# Altium PCB CtlBoard_issueA.PcbDoc
Units mm, origin at the board's own origin, x right, y up, seen from the top; angles counter-clockwise.
Board outline 86.2 x 23.2 mm, 2 copper layers (Top Layer, Bottom Layer), stack 1.572 mm thick; 37 components, 25 nets, 100 pads, 51 vias.
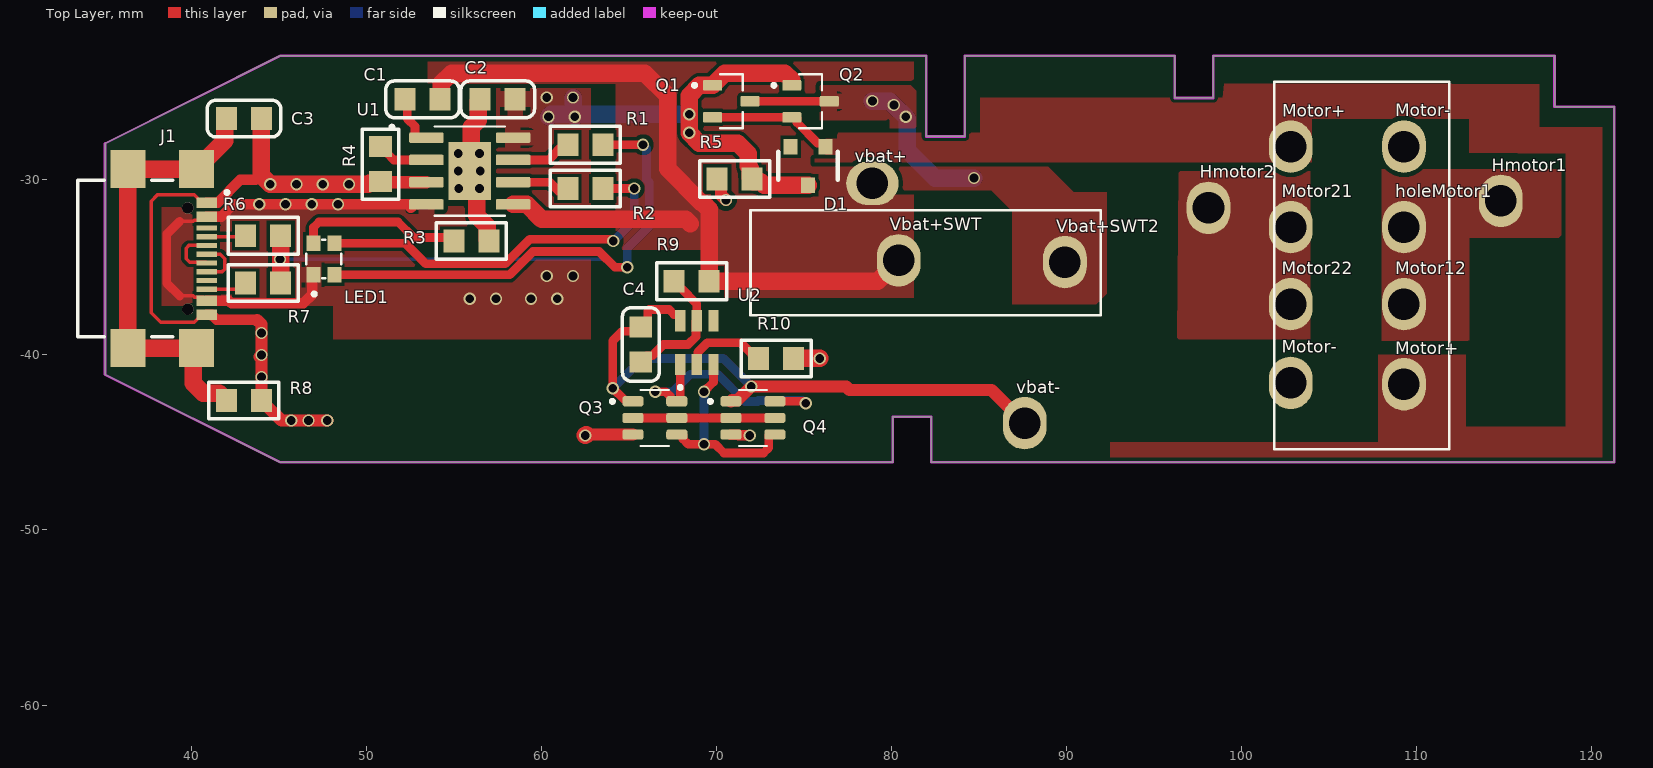
[diagram p0: Top Layer view]
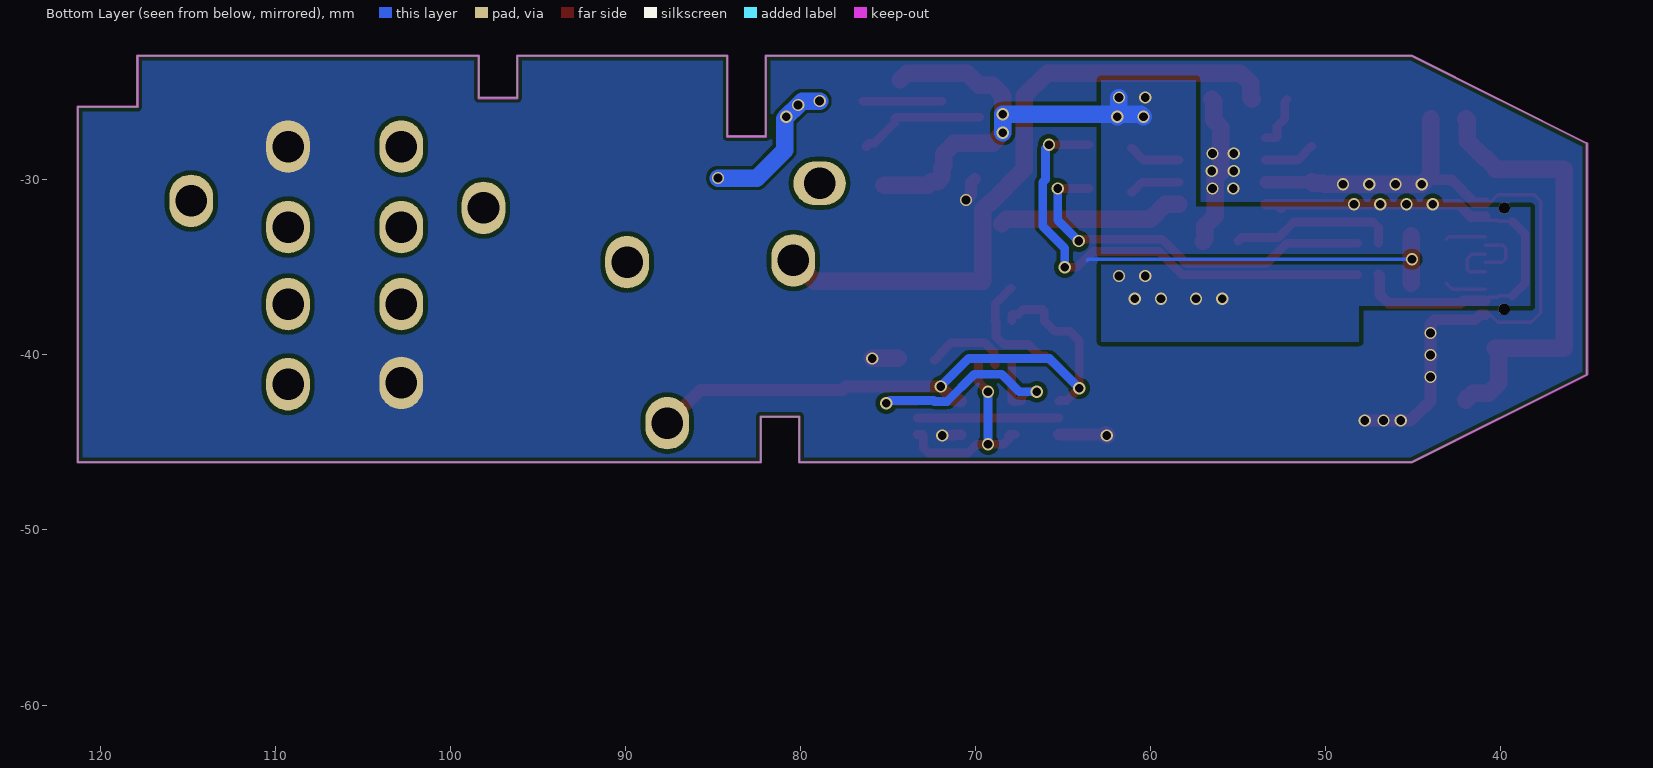
[diagram p1: Bottom Layer view, seen from below]

## Layer stack, top to bottom
Top Solder: solder mask 0.0102, Solder Resist, Dk 3.5
Top Layer: signal copper 0.035
Prepeg1: prepreg 0.2184, PP-023, Dk 4.5
core: dielectric 1.065, FR-4, Dk 4.8
Prepeg2: prepreg 0.2184, PP-023, Dk 4.5
Bottom Layer: signal copper 0.035
Bottom Solder: solder mask 0.0102, Solder Resist, Dk 3.5

## Board outline
80.067,-46.123 80.067,-43.523 82.267,-43.523 82.267,-46.123 121.267,-46.123 121.267,-25.823 117.867,-25.823 117.867,-22.923 98.367,-22.923 98.367,-25.323 96.167,-25.323 96.167,-22.923 84.167,-22.923 84.167,-27.523 81.967,-27.523 81.967,-22.923 45.067,-22.923 35.067,-27.923 35.067,-41.123 45.067,-46.123

## Design rules (kind name [scope] priority, off if disabled: settings)
Clearance Clearance_4 [HasFootprint('USBc4110-GF-A_REVB') vs HasFootprint('USBc4110-GF-A_REVB')] p1: gap=0.15 ignorepadtopadclearanceinfootprint=FALSE except(0: Arc-Hole Track-Hole SMDPad-Hole THPad-Hole Via-Hole Fill-Hole Poly-Hole Region-Hole Text-Hole) // USB -C CONNECTOR EXEPTIONS
Clearance [All] p2: gap=0.254 ignorepadtopadclearanceinfootprint=FALSE except(0: Arc-Hole Track-Hole SMDPad-Hole THPad-Hole Via-Hole Fill-Hole Poly-Hole Region-Hole Text-Hole; 0.076: Track-Track; 0.127: Arc-Arc Arc-Track SMDPad-SMDPad; 0.2: Arc-SMDPad Track-SMDPad Track-Fill Track-Poly Track-Region SMDPad-Fill SMDPad-Poly SMDPad-Region; 0.33: Track-THPad; 0.5: THPad-THPad) // JLC PCB
DiffPairsRouting [All] p1: maxlimit=0.254 minlimit=0.254 mostfreqgap=0.254 toplayer_minwidth=0.127 toplayer_maxwidth=0.381 toplayer_prefwidth=0.381 bottomlayer_minwidth=0.381 bottomlayer_maxwidth=0.381 bottomlayer_prefwidth=0.381 maxuncoupledlength=12.7
FabricationTestPointUsage TestPointUsage [All] p1: valid=0 allowmultiple=FALSE
FabricationTestpoint Testpoint [All] p1: side=3 testpointundercomponent=TRUE minsize=1.016 maxsize=2.54 preferedsize=1.524 minholesize=0.508 maxholesize=1.016 preferedholesize=0.813 testpointgrid=0.025 allowsidetop=TRUE allowsidebottom=TRUE usegrid=TRUE gridtolerance=0
Height [All] p1: minheight=0 maxheight=30 prefheight=12.7
HoleSize [InNetClass('All Nets')] p1: absolutevalues=TRUE maxlimit=6.5 minlimit=0.15 maxpercent=80.000 minpercent=20.000
HoleSize PlatedSlot [InNetClass('All Nets')] p2: absolutevalues=TRUE maxlimit=6.5 minlimit=0.15 maxpercent=80.000 minpercent=20.000
HoleSize NonPlatedSlot [InNetClass('All Nets')] p3: absolutevalues=TRUE maxlimit=6.5 minlimit=0.15 maxpercent=80.000 minpercent=20.000
MinimumSolderMaskSliver [All] p1: minsoldermaskwidth=0.2
PasteMaskExpansion PasteMaskExpansion_1 [All] p2: expansion=0
PlaneClearance PlaneClearance_1 [All] p1: clearance=0.508
PlaneClearance [All] p2: clearance=0.254
PlaneConnect PlaneConnect_1 [InNet('VBUS')] p1: planeconnectstyle=Direct reliefexpansion=0.508 reliefentries=4 reliefconductorwidth=0.254 reliefairgap=0.254
PlaneConnect [All] p2: planeconnectstyle=Direct reliefexpansion=0.508 reliefentries=4 reliefconductorwidth=0.254 reliefairgap=0.254
PolygonConnect PolygonConnect_VBUS [All] p1: thpad.connectstyle=Direct thpad.reliefconductorwidth=0.254 thpad.reliefentries=4 thpad.polygonreliefangle="90 Angle" thpad.airgapwidth=0.254 smdpad.connectstyle=Relief smdpad.reliefconductorwidth=0.9 smdpad.reliefentries=4 smdpad.polygonreliefangle="90 Angle" smdpad.airgapwidth=0.254 via.connectstyle=Direct via.reliefconductorwidth=0.254 via.reliefentries=4 via.polygonreliefangle="90 Angle" via.airgapwidth=0.254
PolygonConnect PolygonConnect_VD33 [InNet('VD33')] p2: connectstyle=Direct reliefconductorwidth=0.254 reliefentries=4 polygonreliefangle="90 Angle" airgapwidth=0.254
PolygonConnect [All] p3: connectstyle=Relief reliefconductorwidth=0.254 reliefentries=4 polygonreliefangle="90 Angle" airgapwidth=0.254
RoutingVias [All] p1: holewidth=0.5 width=0.7 viastyle="Through Hole" minholewidth=0.2 minwidth=0.4 maxholewidth=1 maxwidth=2 viatemplateguid#1={9CC2C62E-9A94-49F8-BFC1-2DE6E39486EC} viatemplateguid#2={3F7673C6-29B5-4E43-866C-EA4EEBB81D59} viatemplateguid#3={DF825023-4461-4306-8155-B17925B55DEA} viatemplateguid#4={6843DF4C-3EEC-417A-807C-60BAB1C6514E} viatemplateguid#5={9E414EF3-CE01-48F1-8449-4E532C2390F4} viatemplatename#1=v70h50 viatemplatename#2=v25h15 viatemplatename#3=v30h15 viatemplatename#4=v50h30 viatemplatename#5=v120h70 // JLC PCB
ShortCircuit ShortCircuit_1 [All] p2: allowed=FALSE
SilkToSilkClearance [All] p1: silktosilkclearance=0.127
SilkToSolderMaskClearance [IsPad] p1: minsilkscreentomaskgap=0.127 clearancetoexposedcopper=TRUE
SolderMaskExpansion SolderMaskExpansion_1 [All] p1: expansion=0.102 istentingtop=FALSE
SolderMaskExpansion [All] p2: expansion=0.051 istentingtop=FALSE
SupplyNets "Schematic Supply Nets_4" [InNet('CHS')] p1: voltage=0.000
SupplyNets "Schematic Supply Nets_3" [InNet('GND')] p2: voltage=0.000
SupplyNets "Schematic Supply Nets_2" [InNet('-Vbat')] p3: voltage=0.000
SupplyNets "Schematic Supply Nets_1" [InNet('VBUS')] p4: voltage=0.000
SupplyNets "Schematic Supply Nets" [InNet('+Vbat')] p5: voltage=0.000
UnRoutedNet UnRoutedNet_1 [All] p2:
Width Width_1 [All] p1: maxlimit=3 minlimit=0.076 preferedwidth=0.2
20 further rules are at their usual default settings.

## Components (designator, comment, footprint, x,y, rotation, side; value= is the part's Value field where it differs from the comment)
C1 "10U" CAPC2012X60N 53.2,-25.4 r0 top
C2 "100N" CAPC2012X60N 57.5,-25.4 r0 top
C3 "100N" CAPC2012X60N 43,-26.5 r0 top
C4 "100N" CAPC2012X60N 65.675,-39.4 r270 top
D1 "ZHCS1000TA" SOT95P230X110-3N 75.227,-29.204 r90 top
Hmotor1 "TESTPINT" P200X100H90L100H50 114.8,-31.2 r90 top
Hmotor2 "TESTPINT" P200X100H90L100H50 98.1,-31.6 r90 top
holeMotor1 "TESTPINT" P200X100H90L100H50 109.267,-32.7 r90 top
J1 "USB" GCT_USB4110-GF-A_REVB 39.8,-34.5 r270 top
LED1 "LED RGB" LEDSC220X200X190-4 47.567,-34.523 r90 top
Motor12 "TESTPINT" P200X100H90L100H50 109.267,-37.1 r90 top
Motor21 "TESTPINT" P200X100H90L100H50 102.8,-32.7 r90 top
Motor22 "TESTPINT" P200X100H90L100H50 102.8,-37.1 r90 top
Motor+ "TESTPINT" P200X100H90L100H50 102.8,-28.1 r90 top
Motor+ "TESTPINT" P200X100H90L100H50 109.267,-41.673 r90 top
Motor- "TESTPINT" P200X100H90L100H50 102.8,-41.6 r90 top
Motor- "TESTPINT" P200X100H90L100H50 109.267,-28.1 r90 top
Q1 "" SOT91P240X110-3N 70.843,-25.515 r0 top
Q2 "" SOT91P240X110-3N 75.368,-25.515 r0 top
Q3 "FS8205" SOT95P280X145-6N#1 66.475,-43.6 r0 top
Q4 "FS8205" SOT95P280X145-6N#1 72.075,-43.6 r0 top
R1 "1K0" RESC2012X60N 62.5,-28 r180 top
R2 "1K0" RESC2012X60N 62.5,-30.5 r180 top
R3 "1K0" RESC2012X60N 56,-33.5 r180 top
R4 "1K2" RESC2012X60N 50.8,-29.1 r90 top
R5 "10K" RESC2012X60N 71.027,-29.954 r0 top
R6 "5K1" RESC2012X60N 44.1,-33.2 r180 top
R7 "5K1" RESC2012X60N 44.1,-35.9 r180 top
R8 "0R0" RESC2012X60N 43,-42.6 r180 top
R9 "100R" RESC2012X60N 68.575,-35.8 r180 top
R10 "1K0" RESC2012X60N 73.4,-40.2 r180 top
U1 "LITHUM CHARGER" SOP127P600X175-9N 55.9,-29.5 r270 top
U2 "LITHUM PROTECTION" SOT95P280X145-6N#2 68.875,-39.3 r90 top
vbat+ "TESTPINT" P200X100H90L100H50 78.9,-30.2 r180 top
Vbat+SWT "TESTPINT" P200X100H90L100H50 80.4,-34.6 r90 top
Vbat+SWT2 "TESTPINT" P200X100H90L100H50 89.9,-34.7 r90 top
vbat- "TESTPINT" P200X100H90L100H50 87.6,-43.9 r90 top

## Footprints (in the part's own frame and the unit in brackets; to place one, negate y for a bottom-side part, rotate by r counter-clockwise, add the part's x,y. Pads: shape width x height; smd on the part's side, far side on the other; paste and mask are expansions set on the pad)
CAPC2012X60N [mm] "[0002]CAP0805_SMD_CAPC2012X60N"
  rect 1.2x1.3 smd paste+0: 1(-1,0) 2(1,0)
  silkscreen extent -2.1,-1.05 2.1,1.05, body extent -0.97,-0.65 1.03,0.6, height 0.78
GCT_USB4110-GF-A_REVB [mm] "[0502]USB_C_2-0_SMD_RA_USB4110-GF"
  rect 0.6x1.15 smd: A1/B12(-3.2,1.075) A4/B9(-2.4,1.075) B1/A12(3.2,1.075) B4/A9(2.4,1.075)
  rect 0.3x1.15 smd: A5(-1.25,1.075) A6(-0.25,1.075) A7(0.25,1.075) A8(1.25,1.075) B5(1.75,1.075) B6(0.75,1.075) B7(-0.75,1.075) B8(-1.75,1.075)
  rect 2.18x2 smd: S1(-5.11,0.5) S2(5.11,0.5) S3(-5.11,-3.43) S4(5.11,-3.43)
  round 0.65 hole 0.65 unplated: ""(-2.89,0) ""(2.89,0)
  silkscreen extent -4.47,-6.28 4.47,2.33, body extent -5.65,-6.28 5.65,1.42, height 3.27
LEDSC220X200X190-4 [mm] "[0401]LED_RGB_SMT_ASMB-KTF0-0A306_LEDSC220X200X190-4"
  rect 0.9x0.8 smd: 1(-0.9,0.6) 2(-0.9,-0.6) 3(0.9,-0.6) 4(0.9,0.6)
  silkscreen extent -2.1,-1 1.1,1, body extent -1.1,-1 1.1,1, height 1.93
P200X100H90L100H50 [mm] "[0510]TestPin_Serrated_THT_P200X100H90L100H50"
  oval 3x2.5 hole 1.8: 1(0,0)
  body extent -0.45,-0.45 0.45,0.45, height 6.8
RESC2012X60N [mm] "[0001]RES0805_SMD_RESC2012X60N"
  rect 1.2x1.3 smd paste+0: 1(-1,0) 2(1,0)
  silkscreen extent -2,-1.05 2,1.05, body extent -0.97,-0.63 1.03,0.63, height 0.47
SOP127P600X175-9N [mm] "[0117]TP4056_SOP127P600X175-9N"
  rrect25% 0.6x1.97 smd: 1(-1.905,-2.475) 2(-0.635,-2.475) 3(0.635,-2.475) 4(1.905,-2.475) 5(1.905,2.475) 6(0.635,2.475) 7(-0.635,2.475) 8(-1.905,2.475)
  rect 3.302x2.413 smd paste-3: 9(0,0)
  silkscreen extent -2.6,-4.54 2.55,2, body extent -2.45,-3 2.45,3, height 1.76
SOT91P240X110-3N [mm] "[0303]DMP1045U_SOT91P240X110-3N"
  rrect25% 1.09x0.61 smd: 1(-1.07,0.915) 2(-1.07,-0.915) 3(1.07,0)
  silkscreen extent -2.2,-1.54 0.65,1.54, body extent -1.21,-1.5 1.21,1.5, height 1.13
SOT95P230X110-3N [mm] "[0308]Diode_Schottky_SMT_SOT95P230X110-3N"
  rect 0.9x0.8 smd paste+0: 1(1.1,-1) 2(1.1,1) 3(-1.1,0)
  silkscreen extent -0.8,-1.7 0.8,1.7, body extent -1.18,-1.45 1.18,1.45, height 1.31
SOT95P280X145-6N#1 [mm] "[0303]FS8205_SOT95P280X145-6N"
  rrect50% 1.21x0.59 smd: 1(-1.255,0.95) 2(-1.255,0) 3(-1.255,-0.95) 4(1.255,-0.95) 5(1.255,0) 6(1.255,0.95)
  silkscreen extent -2.53,-1.6 0.8,1.6, body extent -1.4,-1.45 1.4,1.45, height 1.46
SOT95P280X145-6N#2 [mm] "[0303]FS8205_SOT95P280X145-6N"
  rect 1.21x0.59 smd: 1(-1.255,0.95) 2(-1.255,0) 3(-1.255,-0.95) 4(1.255,-0.95) 5(1.255,0) 6(1.255,0.95)
  silkscreen extent -2.65,0.85 -2.46,1.05, body extent -1.4,-1.45 1.4,1.45, height 1.46

## Part data
C1: library part 139, "10U 0805  X6S 35V SMD Ceramic capacitor"
C2 C3 C4: library part 118, "100N 0805 X7R 5% 50V SMD Ceramic capacitor"
D1: library part 219, "ZHCS1000TA Schottky Rectifier, 40V 1A 425 mV"
Hmotor1 Hmotor2 holeMotor1 Motor12 Motor21 Motor22 Motor+ Motor+ Motor- Motor- vbat+ Vbat+SWT Vbat+SWT2 vbat-: library part 509
J1: library part 399, "USB C CONNECTOR SMD"
LED1: library part 557, "ASMB-KTF0-0A306"
Q1 Q2: library part 527, "MOSFET"
Q3 Q4: library part FS8205_1, "Dual N-Channel Enhancement Mode Power MOSFET"
R1 R2 R3 R10: library part 21, "1K0 0805 Thick Film 1% Resistor"
R4: library part 23, "1K2 0805 Thick Film 1% Resistor"
R5: library part 6, "10K 0805Thick Film 1% Resistor"
R6 R7: library part 109, "5K1  0805 Thick Film 1% Resistor"
R8: library part 0, "0R0 0805Thick Film 1% Resistor"
R9: library part 3, "100R 0805Thick Film 1% resistor"
U1: library part 558
U2: library part 559

## Via types
v1: diameter 0.7, hole 0.5, Top Layer to Bottom Layer, 51 vias

## Nets (pads, with @x,y where several pads share a name; then routed paths per layer and width w, separated by ;. In a path a pad name is that pad's centre, name@x,y a point inside that pad or via, vN(x,y) a via of type N, cw(c..) or ccw(c..) an arc to the next point about the centre after c; other vN are vias at no path point)
+Vbat: C1.2 R9.1 U1.5 vbat+.1 Vbat+SWT.1 | length 48.5
  Top Layer w1: C1.2 54.286,-25.314 54.286,-24.486 54.871,-23.9 65.9,-23.9 67.2,-25.2 67.2,-29.367 69.137,-31.304 69.185,-31.304 69.575,-31.694 R9.1 79.2,-35.8 79.9,-35.1 80.4,-35.1 Vbat+SWT.1 ; U1.5 59.155,-31.405 60,-32.25 68.25,-32.25 68.5,-32.5
-Vbat: C4.1 Q3.1 Q4.1 U2.6 vbat-.1 | length 37
  Top Layer w0.5: Q3.1 65.175,-42.605 64.78,-42.605 v1(64.075,-41.9) 64.075,-39.2 64.62,-38.655 65.47,-38.655 66.075,-38.05 66.075,-37.5 66.175,-37.4 67.28,-37.4 67.57,-37.69 67.88,-37.69 67.925,-37.735 U2.6
  Top Layer w0.7: Q4.1 70.875,-42.595 71.19,-42.595 v1(71.98,-41.805) 77.405,-41.805 77.6,-42 85.7,-42 87.043,-43.343 87.461,-43.343 87.6,-43.481 vbat-.1
  Bottom Layer w0.5: v1(64.075,-41.9) 65.775,-40.2 70.387,-40.2 71.98,-41.793 v1(71.98,-41.805)
CHS: C3.1 J1.S1 J1.S2 J1.S3 J1.S4 R8.2 | length 26.2
  Top Layer w1: R8.2 42,-42.55 41.9,-42.45 41.85,-42.45 41.6,-42.2 40.686,-42.2 40.1,-41.614 40.1,-39.81 J1.S2 J1.S4 J1.S3 J1.S1 40.3,-29.3 40.8,-28.8 40.89,-28.8 41.909,-27.781 41.909,-26.591 C3.1
GND: C2.1 C3.2 J1.A1/B12 J1.B1/A12 Motor-.1 Q3.3 Q4.3 R3.1 R4.1 R5.1 R6.1 R7.1 R8.1 R10.1 U1.3 U1.9 | length 78.9
  Top Layer w0.2: J1.B1/A12 40.6,-37.7 40.4,-37.9 40.4,-37.903 40.158,-38.145 38.245,-38.145 37.7,-37.6 37.7,-31.217 38.062,-30.855 40.155,-30.855 40.6,-31.3 J1.A1/B12
  Top Layer w0.6: J1.B1/A12 41.15,-37.7 41.45,-38 43.75,-38 ; J1.A1/B12 41.5,-31.3 42.8,-30 43.649,-30 44,-29.649 ; Q4.3 70.825,-44.555 71.222,-44.555 71.267,-44.6 v1(71.9,-44.6)
  Top Layer w0.7: 43.75,-38 44,-38.25 v1(44,-38.75) v1(44,-40) ; v1@43.9,-40.1 44,-40.2 v1(44,-41.256) R8.1 44,-42.65 44.25,-42.9 44.3,-42.9 45.15,-43.75 v1(45.711,-43.75) v1(46.692,-43.75) v1(47.757,-43.75) ; R4.1 50.835,-30.135 U1.3 ; v1@62.55,-44.55 Q3.3 ; R5.1 70.253,-30.18 70.253,-30.869 v1(70.538,-31.154)
  Top Layer w1: 44,-29.75 v1(44.5,-30.25) v1(46,-30.25) v1(47.5,-30.25) v1(49,-30.25) 50.107,-30.25 50.157,-30.2 50.7,-30.2 R4.1 ; 44,-29.649 C3.2 ; R7.1 R6.1 ; C2.1 56.4,-25.5 56.4,-26.6 56,-27 56,-29.4 U1.9 56.314,-29.914 56.314,-32.064 56.9,-32.65 56.9,-33.4 R3.1 ; v1(62.5,-44.6) v1@62.55,-44.55 ; R10.1 v1(75.9,-40.2)
  Bottom Layer w0.2: v1(45.064,-34.542) 63.542,-34.542 63.6,-34.6
  other v1: 55.276,-30.492 56.464,-30.492 55.25,-29.5 56.5,-29.5 55.25,-28.5 56.464,-28.492
NetC1_1: C1.1 U1.1 | length 3.1
  Top Layer w0.5: C1.1 52.337,-25.537 52.337,-26.507 52.774,-26.944 52.774,-27.545 52.824,-27.595 U1.1
NetC4_2: C4.2 R9.2 U2.5 | length 6.9
  Top Layer w0.5: C4.2 66.025,-40.05 66.325,-40.05 66.975,-39.4 68.375,-39.4 68.83,-38.945 68.83,-38.09 U2.5 68.867,-38.037 68.867,-37.092 R9.2@67.975,-36.2
NetD1_1: D1.1 Motor+.1 Q1.2 Q2.2 | length 7.3
  Top Layer w0.5: Q1.2 Q2.2 74.538,-26.43 74.593,-26.485 74.593,-26.725 75.771,-27.904 76.077,-27.904 76.227,-28.054 D1.1
NetHmotor1_1: Hmotor1.1 holeMotor1.1 Motor12.1
NetHmotor2_1: Hmotor2.1 Motor21.1 Motor22.1
NetJ1_A5: J1.A5 R6.2 | length 2.3
  Top Layer w0.2: J1.A5 42.95,-33.25 R6.2@43.1,-33.4
NetJ1_A6: J1.A6 J1.B6 | length 2.8
  Top Layer w0.2: J1.B6 41.75,-35.25 41.9,-35.1 41.9,-34.5 41.65,-34.25 J1.A6
NetJ1_A7: J1.A7 J1.B7 | length 3.1
  Top Layer w0.2: J1.A7 40.825,-34.7 39.9,-34.7 39.7,-34.5 39.7,-33.9 39.85,-33.75 J1.B7
NetJ1_B5: J1.B5 R7.2 | length 2.4
  Top Layer w0.2: J1.B5 42.75,-36.25 R7.2
NetLED1_2: LED1.2 R1.1 | length 27.6
  Top Layer w0.5: LED1.2 58.177,-35.423 59.5,-34.1 63.3,-34.1 64.2,-35 v1(64.9,-35) ; R1.1 v1(65.8,-28)
  Bottom Layer w0.5: v1(64.9,-35) 64.9,-33.908 66.154,-32.654 66.154,-30.146 66,-29.992 66,-28.2 v1(65.8,-28)
NetLED1_3: LED1.3 R2.1 | length 22.3
  Top Layer w0.5: LED1.3 52.208,-33.623 53.385,-34.8 57.923,-34.8 59.323,-33.4 64,-33.4 v1(64.1,-33.5) ; R2.1 v1(65.3,-30.5)
  Bottom Layer w0.5: v1(64.1,-33.5) 65.3,-32.3 v1(65.3,-30.5)
NetLED1_4: LED1.4 R3.2 | length 9.5
  Top Layer w0.5: LED1.4 46.977,-33.612 46.977,-32.723 47.293,-32.407 51.807,-32.407 52.7,-33.3 54.8,-33.3 R3.2
NetQ1_3: Q1.3 Q2.3 Vbat+SWT2.1 | length 13.2
  Top Layer w0.5: Q1.3 Q2.3
  Bottom Layer w1: v1(78.9,-25.5) 79.9,-25.5 v1(80.128,-25.728) v1(80.8,-26.4) 80.9,-26.5 80.9,-28.302 82.498,-29.9 v1(84.7,-29.9)
NetQ3_2: Q3.2 Q3.5 Q4.2 Q4.5 | length 8.1
  Top Layer w0.5: Q3.2 Q3.5 Q4.2 Q4.5
NetQ3_4: Q3.4 Q4.4 U2.3 | length 11.8
  Top Layer w0.5: Q3.4 68.04,-44.55 68.085,-44.595 68.085,-44.807 68.378,-45.1 v1(69.275,-45.1) 69.92,-45.1 70.42,-45.6 72.682,-45.6 72.975,-45.307 72.975,-44.595 73.02,-44.55 Q4.4 ; v1(69.275,-42.1) 69.825,-41.55 U2.3
  Bottom Layer w0.5: v1(69.275,-45.1) v1(69.275,-42.1)
NetQ3_6: Q3.6 Q4.6 U2.1 | length 15.4
  Top Layer w0.5: v1(66.5,-42.1) 67.082,-42.1 67.375,-42.393 67.375,-42.605 67.42,-42.65 Q3.6 67.88,-42.65 67.925,-42.605 U2.1 ; Q4.6 74.937,-42.65 75.046,-42.759 v1(75.1,-42.759)
  Bottom Layer w0.5: v1(66.5,-42.1) 67.5,-42.1 68.5,-41.1 70.067,-41.1 71.626,-42.659 72.334,-42.659 72.393,-42.6 74.887,-42.6 75.046,-42.759 v1(75.1,-42.759)
NetR1_2: R1.2 U1.7 | length 3
  Top Layer w0.5: U1.7 60.407,-28.865 60.7,-28.572 60.7,-28.55 61.05,-28.2 R1.2@61.1,-28.2
NetR2_2: R2.2 U1.6 | length 3
  Top Layer w0.5: U1.6 60.485,-30.135 61.05,-30.7 R2.2@61.1,-30.7
NetR4_2: R4.2 U1.2 | length 3
  Top Layer w0.5: R4.2 50.85,-28.1 51.2,-28.45 51.2,-28.5 51.565,-28.865 U1.2
NetR10_2: R10.2 U2.2 | length 4.8
  Top Layer w0.5: U2.2 68.92,-40.51 68.92,-39.855 69.475,-39.3 71.375,-39.3 71.975,-39.9 71.975,-39.95 72.325,-40.3 R10.2@72.375,-40.3
VBUS: C2.2 D1.3 J1.A4/B9 J1.B4/A9 LED1.1 Q1.1 Q2.1 R5.2 U1.4 U1.8 | length 56.8
  Top Layer w0.2: 39.335,-36.635 40.113,-36.635 40.178,-36.7 40.675,-36.7 J1.B4/A9 ; 39.335,-32.365 40.113,-32.365 40.178,-32.3 40.675,-32.3 J1.A4/B9
  Top Layer w0.5: 39.335,-36.635 38.6,-35.9 38.6,-33.1 39.335,-32.365
  Top Layer w0.6: J1.B4/A9 42.143,-36.9 42.293,-37.05 46.399,-37.05 46.9,-36.549 46.9,-35.49 LED1.1 ; J1.A4/B9 41.7,-32.1 42.4,-31.4 U1.4@53.045,-31.4 ; U1.4@52.545,-31.6 52.74,-31.405 U1.4
  Top Layer w1: 74.298,-24.295 73.902,-23.9 73.411,-23.9 72.188,-23.9 71.084,-23.9 70.474,-23.9 Q1.1 69.02,-24.6 68.434,-25.186 v1(68.434,-26.25) v1(68.434,-27.314) 69.02,-27.9 71.2,-27.9 71.8,-28.5 71.8,-29.218 71.927,-29.345 71.927,-29.854 R5.2 72.027,-30.004 72.127,-30.104 72.513,-30.104 72.713,-30.304 D1.3
  Bottom Layer w1: v1(60.4,-26.4) 60.55,-26.25 v1@61.8,-26.25 ; v1(61.8,-25.3) v1@61.8,-26.25 ; v1(61.9,-26.4) 61.8,-26.3 v1@61.8,-26.25 ; v1(68.434,-27.314) v1(68.434,-26.25) v1@61.8,-26.25
  other v1: 55.9,-36.8 57.4,-36.8 59.4,-36.8 60.9,-36.8 60.3,-35.5 61.8,-35.5 43.873,-31.4 45.373,-31.4 46.873,-31.4 48.373,-31.4 60.3,-25.3
pads on no net: D1.2 J1. J1.A8 J1.B8 U2.4

## Polygon pours and split planes (outlines as drawn)
NetQ1_3 on Top Layer "VDD_TOP" (solid, pour order 11): 75.857,-24.6 75.9,-24.643 75.9,-26.6 79.7,-26.6 79.8,-26.5 79.9,-26.6 79.9,-30.6 85.7,-30.6 86.9,-31.8 86.9,-37.1 91.7,-37.1 92.3,-36.5 92.3,-30.7 90.4,-30.7 88.5,-28.8 81.7,-28.8 81.4,-28.5 81.4,-24.9 81.1,-24.6
+Vbat on Top Layer "VBAT+_TOP" (solid, pour order 14): 53.5,-23.25 81.25,-23.25 81.25,-36.75 69.5,-36.75 69.5,-34.123 69.575,-34.048 69.527,-34 64.25,-34 64.25,-24.5 53.5,-24.5
NetD1_1 on Top Layer "VDD_TOP" (solid, pour order 10): 85.049,-27.32 75.6,-27.3 75.6,-29 104,-29 104,-26.5 113,-26.5 113,-28.444 118.5,-28.5 118.5,-44.1 112.8,-44.1 112.8,-40 107.8,-40 107.8,-45 92.5,-45 92.5,-46 120.6,-46 120.6,-27 117,-27 117,-24.531 112,-24.5 99,-24.5 98.917,-25.323 85.049,-25.323
NetHmotor2_1 on Top Layer "VDD_TOP" (solid, pour order 13): 96.4,-29.6 96.5,-29.5 103.9,-29.5 103.9,-39.1 96.3,-39.1
NetHmotor1_1 on Top Layer "VDD_TOP" (solid, pour order 12): 108,-29.4 108,-39.2 112.9,-39.2 113,-39.3 113,-33.3 118.1,-33.3 118.3,-33.1 118.3,-29.4
VBUS on Top Layer "Vbus_TOP" (solid, remove dead copper, pour order 20): 38.3,-31.567 38.3,-37.2 48.1,-37.2 48.1,-39.1 62.8,-39.1 62.8,-24.3 57.412,-24.3 57.412,-31.514
GND on Bottom Layer "GND_BTN" (solid, pour order 19): 80.067,-46.123 80.067,-43.523 82.267,-43.523 82.267,-46.123 121.267,-46.123 121.267,-25.823 117.867,-25.823 117.867,-22.923 98.367,-22.923 98.367,-25.323 96.167,-25.323 96.167,-22.923 84.167,-22.923 84.167,-27.523 81.967,-27.523 81.967,-22.923 45.067,-22.923 35.067,-27.923 35.067,-41.123 45.067,-46.123
VBUS on Bottom Layer "Vbus_BTM" (solid, remove dead copper, pour order 16): 38.3,-31.567 38.3,-37.2 48.1,-37.2 48.1,-39.25 62.8,-39.25 62.8,-24.3 57.412,-24.3 57.412,-31.514

## Keep-outs
Keep-Out Layer:
  the board outline again, w0.15

## Other copper
Top Layer:
  region: 45.546,-57.494
  region: 45.546,-57.494
  region: 45.546,-57.494
  region: 50.131,-60.463
  region: 50.131,-60.463
  region: 50.131,-60.463
  region: 51.046,-56.744
  region: 51.046,-56.744
  region: 51.046,-56.744

## Silkscreen, mask and mechanical layers (free items; w line width, h text height)
Top Overlay:
  lines w0.15: 71.937,-37.742 71.937,-31.742 91.937,-31.742 91.937,-37.742 71.937,-37.742 ; 101.847,-45.394 101.847,-24.394 111.847,-24.394 111.847,-45.394 101.847,-45.394
Board outline:
  the board outline again, w0.15
Temp board outline:
  circle w0.15: c47.567,-34.523 r1
  circle w0.15: c60.267,-41.123 r2.5
  lines w0.15: -81.834,-144.943 -81.834,-159.943 -66.834,-159.943 ; -81.834,35.057 -81.834,50.057 -66.834,50.057 ; -66.834,-59.943 -56.834,-59.943 ; 25.166,-112.943 205.166,-112.943 ; 49.166,-112.943 49.166,-102.943 ; 66.666,-154.943 66.666,-144.943 ; 66.666,35.057 66.666,45.057 ; 83.166,-149.943 83.166,-102.943 ; 83.166,-122.943 205.166,-122.943 ; 144.166,-149.943 144.166,-102.943 ; 144.166,-139.943 205.166,-139.943 ; 154.166,-149.943 154.166,-139.943 ; 190.166,-149.943 190.166,-139.943 ; 200.166,-159.943 215.166,-159.943 215.166,-144.943 ; 200.166,-59.943 210.166,-59.943 ; 200.166,50.057 215.166,50.057 215.166,35.057 ; 205.166,-149.943 205.166,40.057 -61.834,40.057 -61.834,-149.943 205.166,-149.943 ; 205.166,-149.943 25.166,-149.943 25.166,-102.943 205.166,-102.943 205.166,-149.943 ; 35.067,-41.123 45.067,-46.123 80.067,-46.123 80.067,-43.523 82.267,-43.523 82.267,-46.123 121.267,-46.123 121.267,-25.823 117.867,-25.823 117.867,-22.923 98.367,-22.923 98.367,-25.323 96.167,-25.323 96.167,-22.923 84.167,-22.923 84.167,-27.523 81.967,-27.523 81.967,-22.923 45.067,-22.923 35.067,-27.923 35.067,-41.123 ; 71.937,-37.742 71.937,-31.742 91.937,-31.742 91.937,-37.742 71.937,-37.742 ; 80.167,-35.123 80.667,-35.123 80.667,-34.123 80.167,-34.123 80.167,-35.123 ; 89.667,-35.123 90.167,-35.123 90.167,-34.123 89.667,-34.123 89.667,-35.123 ; 101.847,-45.394 101.847,-24.394 111.847,-24.394 111.847,-45.394 101.847,-45.394 ; 102.567,-41.923 102.567,-41.423 103.067,-41.423 103.067,-41.923 102.567,-41.923 ; 102.567,-37.423 102.567,-36.923 103.067,-36.923 103.067,-37.423 102.567,-37.423 ; 102.567,-32.923 102.567,-32.423 103.067,-32.423 103.067,-32.923 102.567,-32.923 ; 102.567,-28.423 102.567,-27.923 103.067,-27.923 103.067,-28.423 102.567,-28.423 ; 109.067,-41.923 109.067,-41.423 109.567,-41.423 109.567,-41.923 109.067,-41.923 ; 109.067,-37.423 109.067,-36.923 109.567,-36.923 109.567,-37.423 109.067,-37.423 ; 109.067,-32.923 109.067,-32.423 109.567,-32.423 109.567,-32.923 109.067,-32.923 ; 109.067,-28.423 109.067,-27.923 109.567,-27.923 109.567,-28.423 109.067,-28.423 ; 113.467,-41.891 ccw(c115.217,-41.891) 116.967,-41.891 116.967,-35.191 ccw(c115.217,-35.191) 113.467,-35.191 113.467,-41.891
  text "Technical reference" at 50.116,-105.793 h0.7
  text "Dept." at 26.116,-106.16 h0.7
  text "Created by" at 84.116,-106.16 h0.7
  text "Approved by" at 145.116,-106.16 h0.7
  text "Document status" at 145.116,-115.793 h0.7
  text "Document type" at 84.116,-116.16 h0.7
  text "Title" at 84.116,-125.793 h0.7
  text "DWG No." at 145.116,-125.793 h0.7
  text "Rev." at 145.116,-142.793 h0.7
  text "Date of issue" at 155.116,-142.793 h0.7
  text "Sheet" at 191.116,-142.793 h0.7